# EAGLE board board (EAGLE 9.5.1)
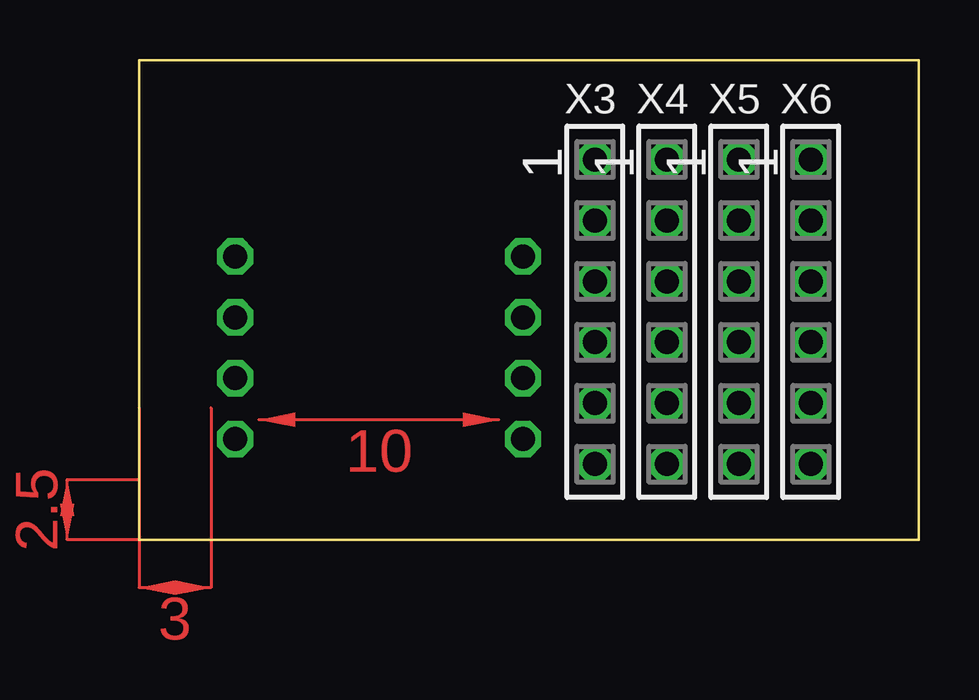
[diagram p0: board, top side]
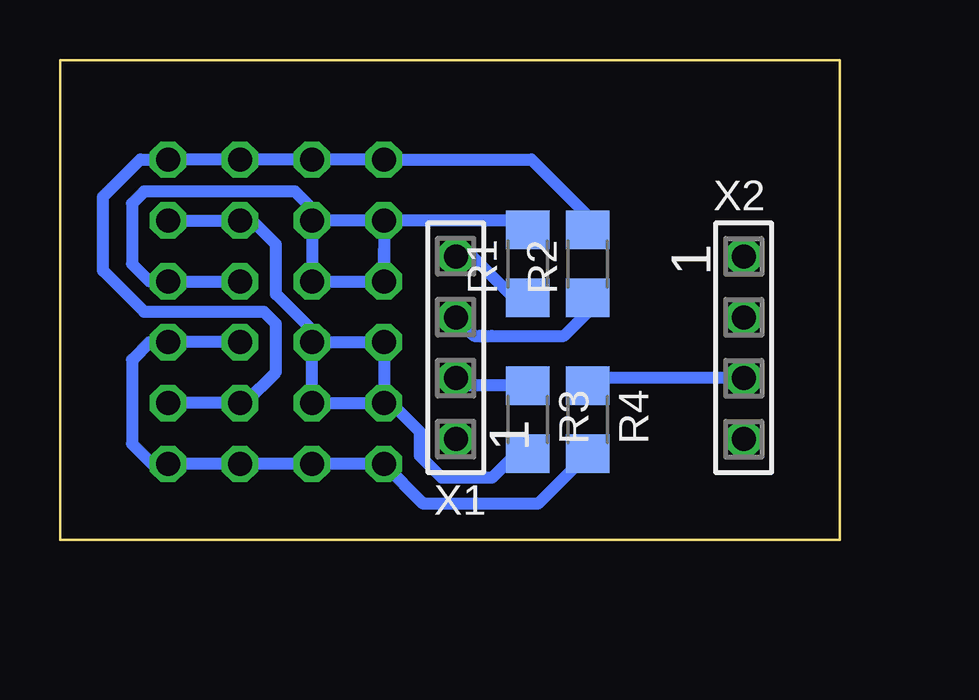
[diagram p1: board, bottom side, seen from below]

Size 32.5 x 20 mm. Coordinates in mm from the lower left corner, seen from the top.
Outline: 0,20 32.5,20 32.5,0 0,0 0,20
Copper layers (1*16): Top 0.035mm / dielectric 1.5mm / Bottom 0.035mm
Design rules "default *": minimum track width 0.5mm, minimum drill 0.35mm, track to track 0.2mm, track to pad 0.2mm, pad to pad 0.2mm, via to via 0.2mm, smd to smd 6mil, copper to edge 40mil, drill to drill 6mil, minimum pad ring 10mil, minimum via ring 8mil, stop-mask expansion 4mil, vias tented up to drill 0mil, thermal gap 10mil

## Footprints (pad centres in the part's own frame; a part is rotated, then mirrored left to right if it is on the bottom)
R1206 = smd 1.6 x 1.803: 1 -1.422,0; 2 1.422,0
SSW-104-02-G-S = drill 1 pad 1.5 octagon: 1 -3.81,0; 2 -1.27,0; 3 1.27,0; 4 3.81,0
SSW-106-02-G-S = drill 1 pad 1.5 octagon: 1 -6.35,0; 2 -3.81,0; 3 -1.27,0; 4 1.27,0; 5 3.81,0; 6 6.35,0

## Placement (x,y rotation side)
R1  50R  [R1206]  13,11.5 90 bottom
R2  50R  [R1206]  10.5,11.5 90 bottom
R3  50R  [R1206]  13,5 270 bottom
R4  50R  [R1206]  10.5,5 270 bottom
X1  SSW-104-02-G-S  [SSW-104-02-G-S]  16,8 90 bottom
X2  SSW-104-02-G-S  [SSW-104-02-G-S]  4,8 270 bottom
X3  SSW-106-02-G-S  [SSW-106-02-G-S]  19,9.5 270 top
X4  SSW-106-02-G-S  [SSW-106-02-G-S]  22,9.5 270 top
X5  SSW-106-02-G-S  [SSW-106-02-G-S]  25,9.5 270 top
X6  SSW-106-02-G-S  [SSW-106-02-G-S]  28,9.5 270 top

## Library data of the parts
R1-R4 = rcl; SPICEPREFIX: R
X1 X2 = con-samtec; MF: Samtec Inc.; MPN: SSW-104-02-G-S; OC_FARNELL: unknown; OC_NEWARK: 11P9384
X3-X6 = con-samtec; MF: Samtec Inc.; MPN: SSW-106-02-G-S; OC_FARNELL: unknown; OC_NEWARK: 11P9416

## Nets
GND: X2.1
PB0: R1.1 X1.4
PB1: R2.1 X1.3
PB2: R3.1 X1.2
PB3: R4.1 X2.3
PB4: X2.2
RST: X2.4
SIG0: R1.2 X3.2 X3.3 X4.2 X4.3 X5.3 X6.3
SIG1: R2.2 X3.1 X4.1 X5.1 X5.5 X6.1 X6.5
SIG2: R3.2 X3.4 X3.5 X4.4 X4.5 X5.2 X6.2
SIG3: R4.2 X3.6 X4.6 X5.4 X5.6 X6.4 X6.6
VCC: X1.1

## Tracks (layer width: path | path; a pad name or v marks a point on that pad's centre or on a via)
PB0
  Bottom 0.5: R1.1 13.58,10.08 15.31,11.81 X1.4
PB1
  Bottom 0.5: R2.1 10.5,9.5 11.5,8.5 14.5,8.5 15,8.5 15.23,8.5 X1.3
PB2
  Bottom 0.5: X1.2 15.69,6.42 R3.1
PB3
  Bottom 0.5: X2.3 10,6.73 | 10,6.73 10.19,6.73 | R4.1 10.31,6.42 10,6.73
SIG0
  Bottom 0.5: X3.2 X3.3 | X3.2 X4.2 | X4.2 X4.3 X3.3 | X4.2 22,13.81 22.7,14.51 29,14.51 29.5,14.01 29.5,11.5 28.77,10.77 X6.3 X5.3 | X3.3 19,12.08 | R1.2 13.39,13.31 X3.2
SIG1
  Bottom 0.5: X6.5 X5.5 24.81,5.69 23.5,7 23.5,9 24,9.5 29,9.5 29,9.51 30.7,11.21 30.7,14.3 29.15,15.85 X6.1 X5.1 X4.1 X3.1 12.85,15.85 10.5,13.5 R2.2
SIG2
  Bottom 0.5: X4.4 X4.5 X3.5 | X3.5 X3.4 X4.4 | X4.4 22,8.73 23.5,10.23 23.5,12.31 24.5,13.31 X5.2 X6.2 | R3.2 13.5,3.58 14.5,2.58 16.58,2.58 17.5,3.5 17.5,4.5 18.69,5.69 X3.5
SIG3
  Bottom 0.5: X3.6 X4.6 X5.6 X6.6 28.65,3.15 29.5,4 29.5,7.5 28.77,8.23 X6.4 X5.4 | X3.6 19,3.08 | R4.2 12.58,1.5 17.35,1.5 X3.6
(copper drawn outside any net)
  shapes: Top area x3